# EAGLE board kick_test2 (EAGLE 4.16)
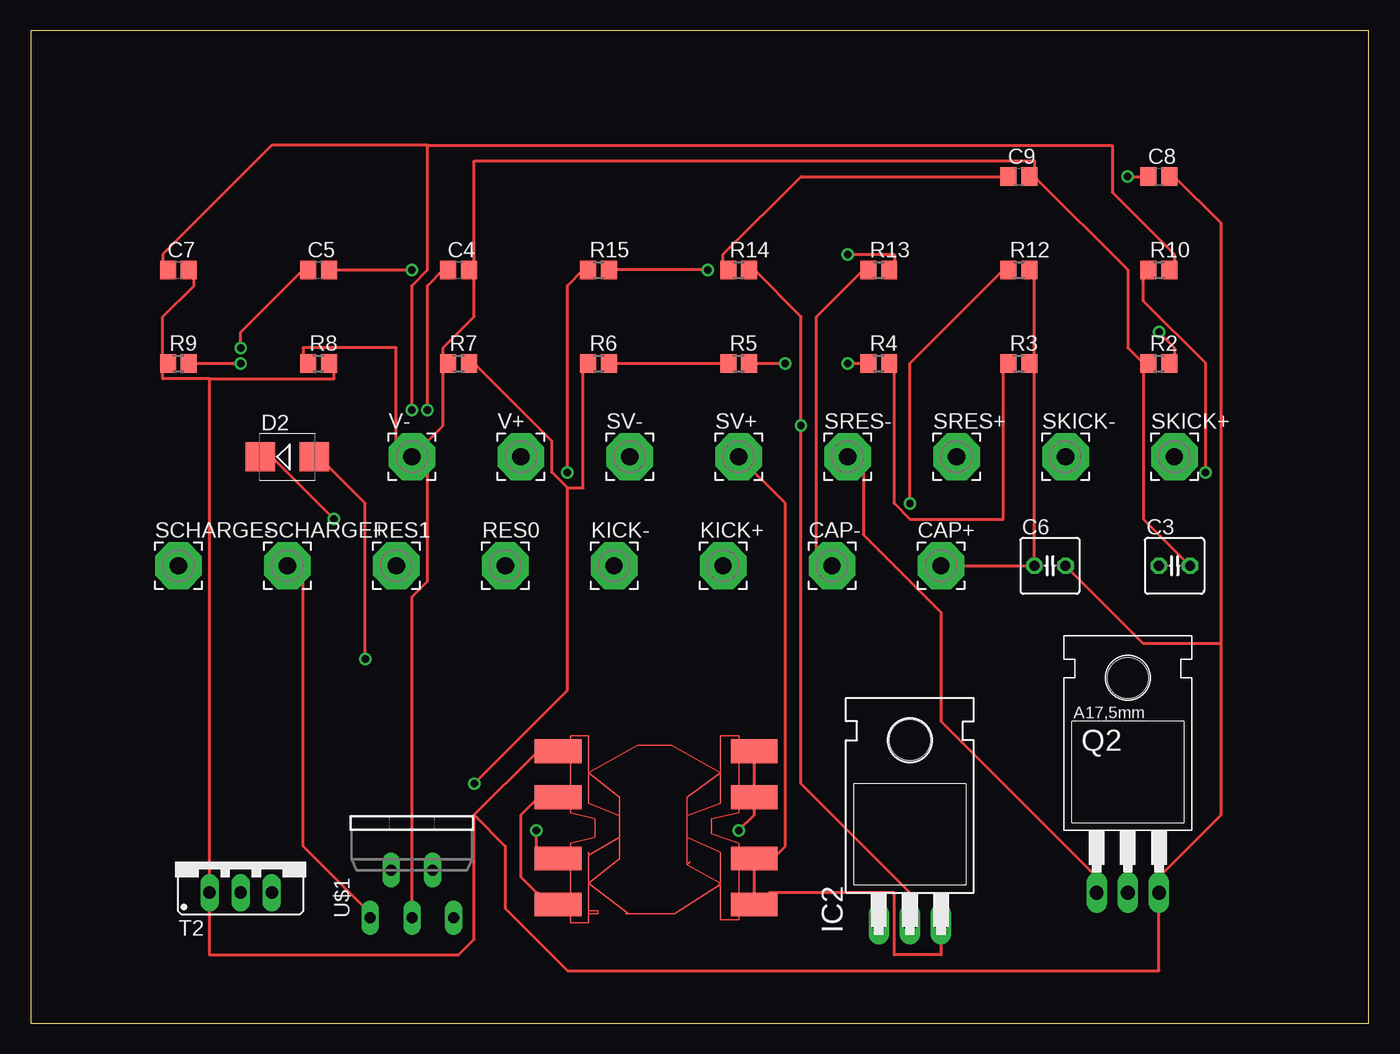
[diagram p0: board, top side]
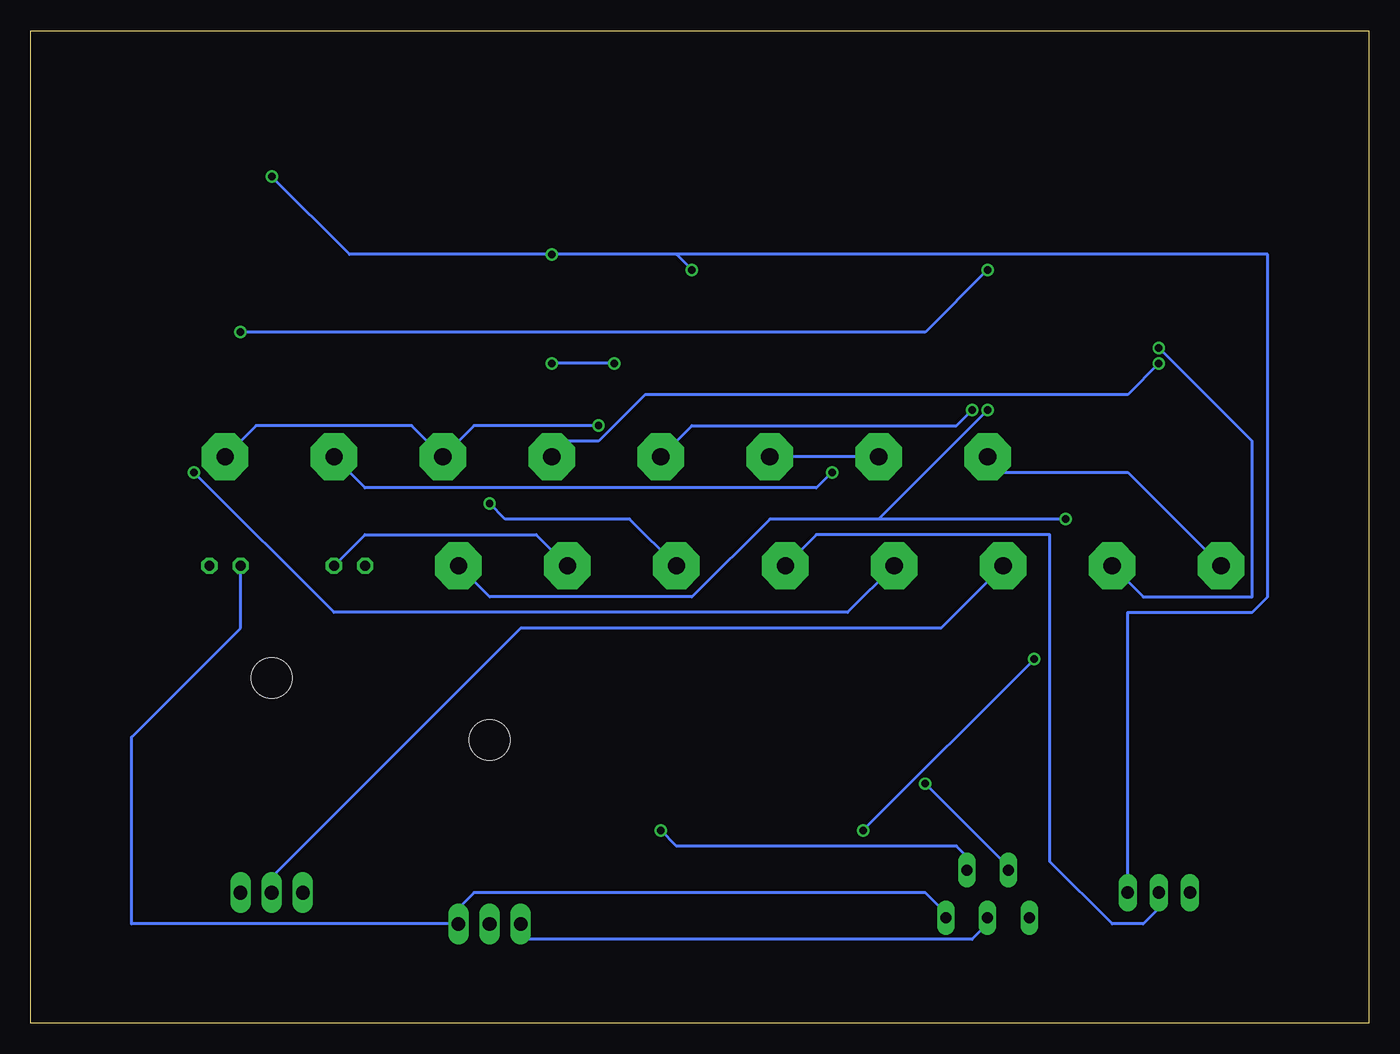
[diagram p1: board, bottom side, seen from below]

Size 109.2 x 80.95 mm. Coordinates in mm from the lower left corner, seen from the top.
Outline: 0,0 109.2,0 109.2,80.95 0,80.95 0,0
Copper layers (1*16): Top 0.035mm / dielectric 1.5mm / Bottom 0.035mm
Design rules "default": minimum track width 10mil, minimum drill 24mil, track to track 8mil, track to pad 8mil, pad to pad 8mil, via to via 8mil, smd to smd 8mil, copper to edge 40mil, drill to drill 8mil, minimum pad ring 10mil, minimum via ring 8mil, stop-mask expansion 4mil, vias tented up to drill 0mil, thermal gap 10mil

## Footprints (pad centres in the part's own frame; a part is rotated, then mirrored left to right if it is on the bottom)
C025-050X050 = drill 0.813 octagon: 1 -1.27,0; 2 1.27,0
C0805 = smd 1.3 x 1.5: 1 -0.85,0; 2 0.85,0
3,81/1,4 = drill 1.397 pad 3.81 octagon: 1 0,0
SMB = smd 2.4 x 2.4: A 2.2,0; C -2.2,0
TO220H = drill 1.118 long: 1 -2.54,-10.16; 2 0,-10.16; 3 2.54,-10.16 | hole 3.302: 0,4.826
TO220 = drill 1.118 long: 1 -2.54,-6.35; 2 0,-6.35; 3 2.54,-6.35 | hole 3.302: 0,11.176
R0805 = smd 1.3 x 1.5: 1 -0.85,0; 2 0.85,0
TO220CS = drill 1.016 long: A 0,-2.54; C -2.54,-2.54; G 2.54,-2.54
TO220-5 = drill 0.9 long: 1 -3.4,-8.4; 2 -1.7,-4.5; 3 0,-8.4; 4 1.7,-4.5; 5 3.4,-8.4
SM = smd 3.81 x 1.93: 1 0.5,-3.5; 2 0.5,0.25; 3 0.5,5.25; 4 0.5,9; 5 16.5,9; 6 16.5,5.25; 7 16.5,0.25; 8 16.5,-3.5

## Placement (x,y rotation side)
C3  [C025-050X050]  93.34,37.3 0 top
C4  [C0805]  34.92,61.43 0 top
C5  [C0805]  23.49,61.43 0 top
C6  [C025-050X050]  83.18,37.3 0 top
C7  [C0805]  12.06,61.43 0 top
C8  [C0805]  92.07,69.05 0 top
C9  [C0805]  80.64,69.05 0 top
CAP+  [3,81/1,4]  74.29,37.3 0 top
CAP-  [3,81/1,4]  65.4,37.3 0 top
D2  ES2D  [SMB]  20.95,46.19 0 top
IC2  317T  [TO220H]  71.75,18.25 0 top
KICK+  [3,81/1,4]  56.51,37.3 0 top
KICK-  [3,81/1,4]  47.62,37.3 0 top
Q2  BUZ60  [TO220]  89.53,16.98 0 top
R2  [R0805]  92.07,53.81 0 top
R3  [R0805]  80.64,53.81 0 top
R4  [R0805]  69.21,53.81 0 top
R5  [R0805]  57.78,53.81 0 top
R6  [R0805]  46.35,53.81 0 top
R7  [R0805]  34.92,53.81 0 top
R8  [R0805]  23.49,53.81 0 top
R9  [R0805]  12.06,53.81 0 top
R10  [R0805]  92.07,61.43 0 top
R12  [R0805]  80.64,61.43 0 top
R13  [R0805]  69.21,61.43 0 top
R14  [R0805]  57.78,61.43 0 top
R15  [R0805]  46.35,61.43 0 top
RES0  [3,81/1,4]  38.73,37.3 0 top
RES1  [3,81/1,4]  29.84,37.3 0 top
SCHARGE+  [3,81/1,4]  20.95,37.3 0 top
SCHARGE-  [3,81/1,4]  12.06,37.3 0 top
SKICK+  [3,81/1,4]  93.34,46.19 0 top
SKICK-  [3,81/1,4]  84.45,46.19 0 top
SRES+  [3,81/1,4]  75.56,46.19 0 top
SRES-  [3,81/1,4]  66.67,46.19 0 top
SV+  [3,81/1,4]  57.78,46.19 0 top
SV-  [3,81/1,4]  48.89,46.19 0 top
T2  BTV58  [TO220CS]  17.14,13.17 0 top
U$1  LT1070  [TO220-5]  31.11,16.98 0 top
U$2  A0009-AL  [SM]  42.54,13.17 0 top
V+  [3,81/1,4]  40,46.19 0 top
V-  [3,81/1,4]  31.11,46.19 0 top

## Library data of the parts
C3-C9 R2-R10 R12-R15 = rcl
CAP+ CAP- KICK+ KICK- RES0 RES1 SCHARGE+ SCHARGE- SKICK+ SKICK- SRES+ SRES- SV+ SV- V+ V- = wirepad
D2 = diode
IC2 = linear
Q2 = transistor-fet
T2 = triac
U$1 = linear-technology
U$2 = Kicker2

## Nets
GND: C3.2 C4.2 C9.2 IC2.1 R2.1 R7.1 R8.1 SCHARGE-.1 U$1.3 V-.1
N$1: SV-.1 V+.1
N$2: KICK+.1 R12.1
N$3: U$1.4 U$2.5 U$2.6
N$4: C5.1 SCHARGE+.1 U$1.1
N$5: C3.1 C4.1 IC2.3 SV+.1 U$1.5 U$2.7 U$2.8
N$6: R6.1 R7.2 U$1.2
N$7: D2.A U$2.2
N$9: C5.2 R2.2
N$10: C6.2 C7.2 C8.2 CAP-.1 Q2.3 R8.2 R9.1 R13.1 T2.C U$2.4
N$11: C6.1 C7.1 CAP+.1 D2.C R3.2 R10.2 R12.2
N$12: R3.1 R4.2
N$13: R4.1 R5.2
N$14: R5.1 R6.2
N$15: U$2.1 U$2.3
N$16: R10.1 RES0.1
N$18: Q2.2 RES1.1
N$19: IC2.2 R14.2 SKICK+.1 SRES+.1
N$20: KICK-.1 T2.A
N$21: C8.1 R13.2 R15.2 T2.G
N$22: R15.1 SKICK-.1
N$23: C9.1 R14.1
N$24: Q2.1 R9.2 SRES-.1

## Tracks (layer width: path | path; a pad name or v marks a point on that pad's centre or on a via)
GND
  Top 0.254: 90.8,53.81 90.8,41.11 C3.2 | 81.91,69.05 89.53,61.43 89.53,55.08 90.8,53.81 | 90.8,53.81 R2.1 | R8.1 22.22,53.81 22.22,55.08 29.84,55.08 29.84,47.46 V-.1 | 33.65,53.81 33.65,48.73 V-.1 | 36.19,61.43 36.19,57.62 33.65,55.08 33.65,53.81 | 33.65,53.81 R7.1 | U$1.3 31.11,34.76 32.38,36.03 32.38,44.92 V-.1 | 81.91,69.05 81.91,70.32 36.19,70.32 36.19,61.43 | 81.91,69.05 C9.2 | 36.19,61.43 C4.2
  Bottom 0.254: U$1.3 31.11,8.09 32.38,6.82 69.21,6.82 IC2.1 | SCHARGE-.1 19.68,44.92 29.84,44.92 V-.1
N$1
  Bottom 0.254: V+.1 SV-.1
N$2  (via drill 0.61)
  Top 0.254: v71.75,42.38 71.75,53.81 79.37,61.43 R12.1
  Bottom 0.254: v71.75,42.38 70.48,41.11 60.32,41.11 KICK+.1
N$3  (via drill 0.61)
  Top 0.254: v57.78,15.71 59.05,16.98 59.05,18.25 | 59.05,18.25 59.05,22.06 U$2.5 | 59.05,18.25 U$2.6
  Bottom 0.254: v57.78,15.71 56.51,14.44 33.65,14.44 32.38,13.17 U$1.4
N$4  (via drill 0.61)
  Top 0.254: v17.14,55.08 17.14,56.35 22.22,61.43 C5.1 | U$1.1 27.3,9.36 22.22,14.44 22.22,36.03 SCHARGE+.1
  Bottom 0.254: v17.14,55.08 9.52,47.46 9.52,34.76 18.41,34.76 SCHARGE+.1
N$5  (via drill 0.61)
  Top 0.254: v32.38,50 32.38,60.16 33.65,61.43 C4.1 | SV+.1 61.59,42.38 61.59,14.44 60.32,13.17 U$2.7 59.05,13.17 59.05,10.63 U$2.8 60.32,10.63 70.48,10.63 70.48,5.55 74.29,5.55 IC2.3
  Bottom 0.254: v32.38,50 33.65,48.73 55.24,48.73 SV+.1 | C3.1 92.07,32.22 100.96,23.33 100.96,8.09 IC2.3 74.29,9.36 73.02,10.63 36.19,10.63 34.92,9.36 U$1.5
N$6  (via drill 0.61)
  Top 0.254: 43.81,43.65 42.54,44.92 42.54,47.46 36.19,53.81 R7.2 | 43.81,43.65 45.08,43.65 45.08,53.81 R6.1 | v36.19,19.52 43.81,27.14 43.81,43.65
  Bottom 0.254: v36.19,19.52 29.84,13.17 U$1.2
N$7  (via drill 0.61)
  Top 0.254: v27.3,29.68 27.3,42.38 23.49,46.19 D2.A | v41.27,15.71 41.27,13.17 U$2.2
  Bottom 0.254: v41.27,15.71 v27.3,29.68
N$9  (via drill 0.61)
  Top 0.254: v92.07,56.35 93.34,55.08 93.34,53.81 R2.2 | C5.2 v31.11,61.43
  Bottom 0.254: v31.11,61.43 36.19,56.35 v92.07,56.35
N$10
  Top 0.254: 10.79,53.81 10.79,57.62 13.33,60.16 13.33,61.43 C7.2 | 14.6,52.54 10.79,52.54 10.79,53.81 | 14.6,52.54 24.76,52.54 24.76,53.81 R8.2 | 10.79,53.81 R9.1 | 14.6,52.54 T2.C 14.6,5.55 34.92,5.55 36.19,6.82 36.19,16.98 | 36.19,16.98 41.27,22.06 U$2.4 | R13.1 67.94,61.43 64.13,57.62 64.13,38.57 CAP-.1 | 97.15,30.95 97.15,16.98 92.07,11.9 Q2.3 92.07,4.28 43.81,4.28 38.73,9.36 38.73,14.44 36.19,16.98 | 97.15,30.95 97.15,65.24 93.34,69.05 C8.2 | C6.2 90.8,30.95 97.15,30.95
  Bottom 0.254: C6.2 81.91,39.84 67.94,39.84 CAP-.1
N$11  (via drill 0.61)
  Top 0.254: 32.38,71.59 88.26,71.59 88.26,67.78 93.34,62.7 93.34,61.43 R10.2 | 32.38,71.59 19.68,71.59 10.79,62.7 10.79,61.43 C7.1 | 81.91,53.81 81.91,61.43 R12.2 | v24.76,41.11 19.68,46.19 D2.C | CAP+.1 C6.1 81.91,53.81 | 81.91,53.81 R3.2 | 32.38,71.59 32.38,61.43 31.11,60.16 v31.11,50
  Bottom 0.254: 40,41.11 48.89,41.11 55.24,34.76 71.75,34.76 CAP+.1 | v24.76,41.11 40,41.11 | 40,41.11 v31.11,50
N$12
  Top 0.254: R4.2 70.48,53.81 70.48,42.38 71.75,41.11 79.37,41.11 79.37,53.81 R3.1
N$13  (via drill 0.61)
  Top 0.254: R5.2 v61.59,53.81 | v66.67,53.81 R4.1
  Bottom 0.254: v61.59,53.81 v66.67,53.81
N$14
  Top 0.254: R6.2 R5.1
N$15
  Top 0.254: U$2.1 41.27,10.63 40,11.9 40,16.98 41.27,18.25 U$2.3
N$16  (via drill 0.61)
  Top 0.254: v95.88,44.92 95.88,53.81 90.8,58.89 90.8,61.43 R10.1
  Bottom 0.254: v95.88,44.92 84.45,33.49 42.54,33.49 RES0.1
N$18
  Bottom 0.254: Q2.2 89.53,11.9 69.21,32.22 34.92,32.22 RES1.1
N$19  (via drill 0.61)
  Top 0.254: R14.2 59.05,61.43 62.86,57.62 v62.86,48.73 62.86,19.52 71.75,10.63 IC2.2
  Bottom 0.254: SKICK+.1 90.8,48.73 78.1,48.73 SRES+.1 73.02,48.73 v62.86,48.73
N$20
  Bottom 0.254: T2.A 17.14,9.36 18.41,8.09 20.95,8.09 26.03,13.17 26.03,39.84 45.08,39.84 KICK-.1
N$21  (via drill 0.61)
  Top 0.254: v66.67,62.7 70.48,62.7 70.48,61.43 R13.2 | v55.24,61.43 R15.2 | v89.53,69.05 C8.1
  Bottom 0.254: 56.51,62.7 v55.24,61.43 | 56.51,62.7 v66.67,62.7 83.18,62.7 v89.53,69.05 | 56.51,62.7 8.25,62.7 8.25,34.76 9.52,33.49 19.68,33.49 T2.G
N$22  (via drill 0.61)
  Top 0.254: v43.81,44.92 43.81,60.16 45.08,61.43 R15.1
  Bottom 0.254: v43.81,44.92 45.08,43.65 81.91,43.65 SKICK-.1
N$23
  Top 0.254: R14.1 56.51,61.43 56.51,62.7 62.86,69.05 C9.1
N$24  (via drill 0.61)
  Top 0.254: R9.2 v17.14,53.81 | Q2.1 86.99,11.9 74.29,24.6 74.29,33.49 67.94,39.84 67.94,44.92 SRES-.1
  Bottom 0.254: v17.14,53.81 19.68,51.27 59.05,51.27 62.86,47.46 65.4,47.46 SRES-.1